# Altium PCB PCB1.PcbDoc
Units mm, origin at the board's own origin, x right, y up, seen from the top; angles counter-clockwise.
Board outline 42.96 x 79.64 mm, 2 copper layers (Top Layer, Bottom Layer); 26 components, 47 nets, 134 pads, 6 vias.
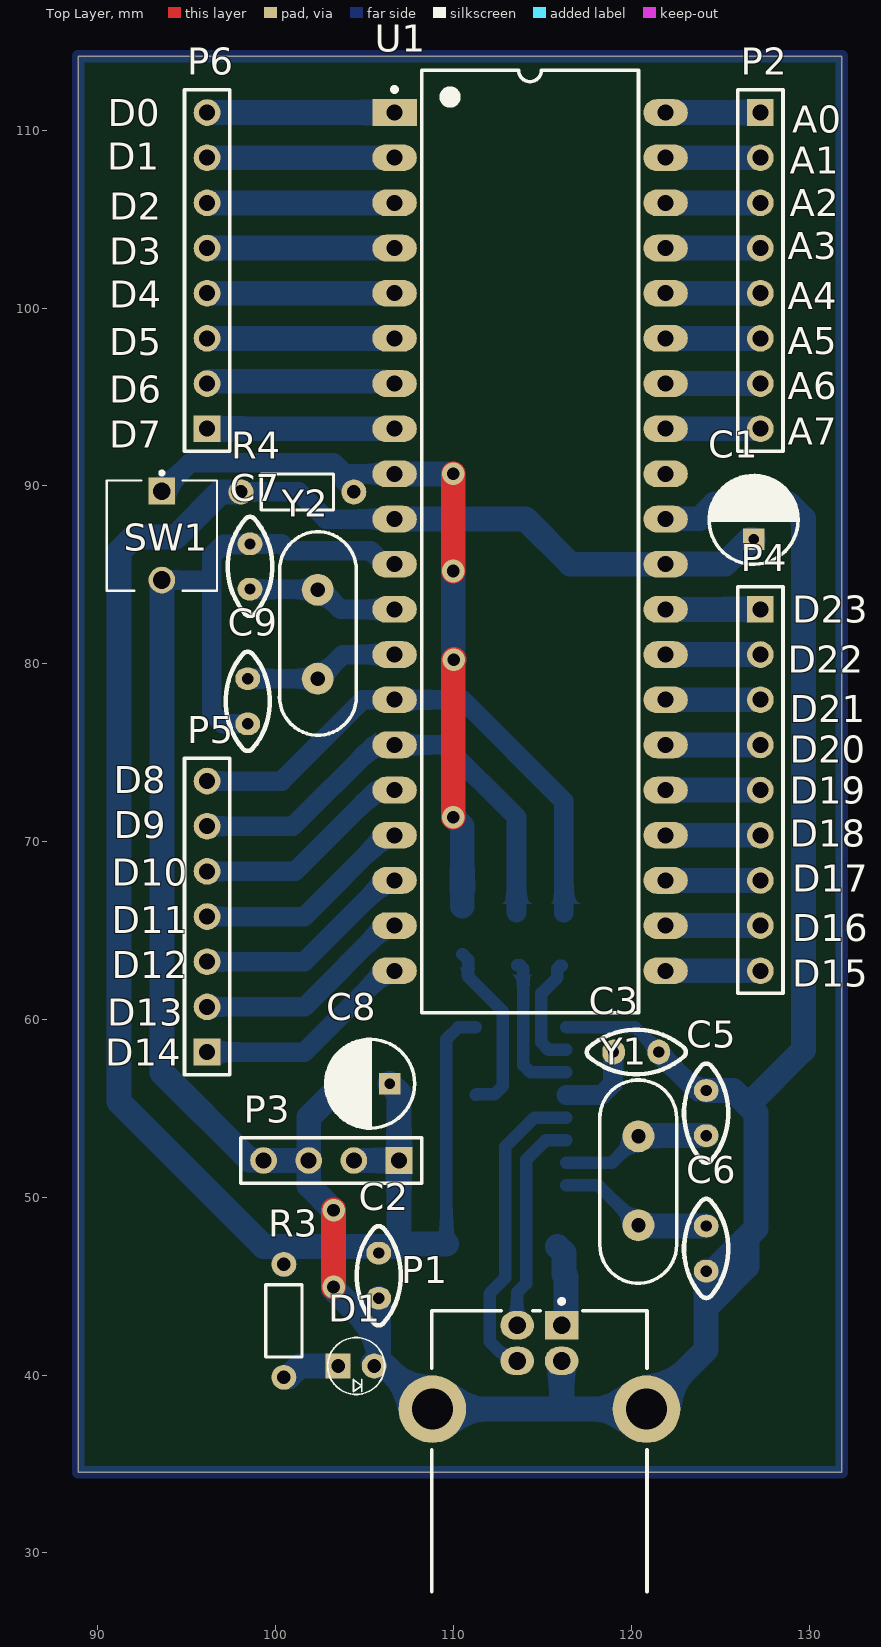
[diagram p0: Top Layer view]
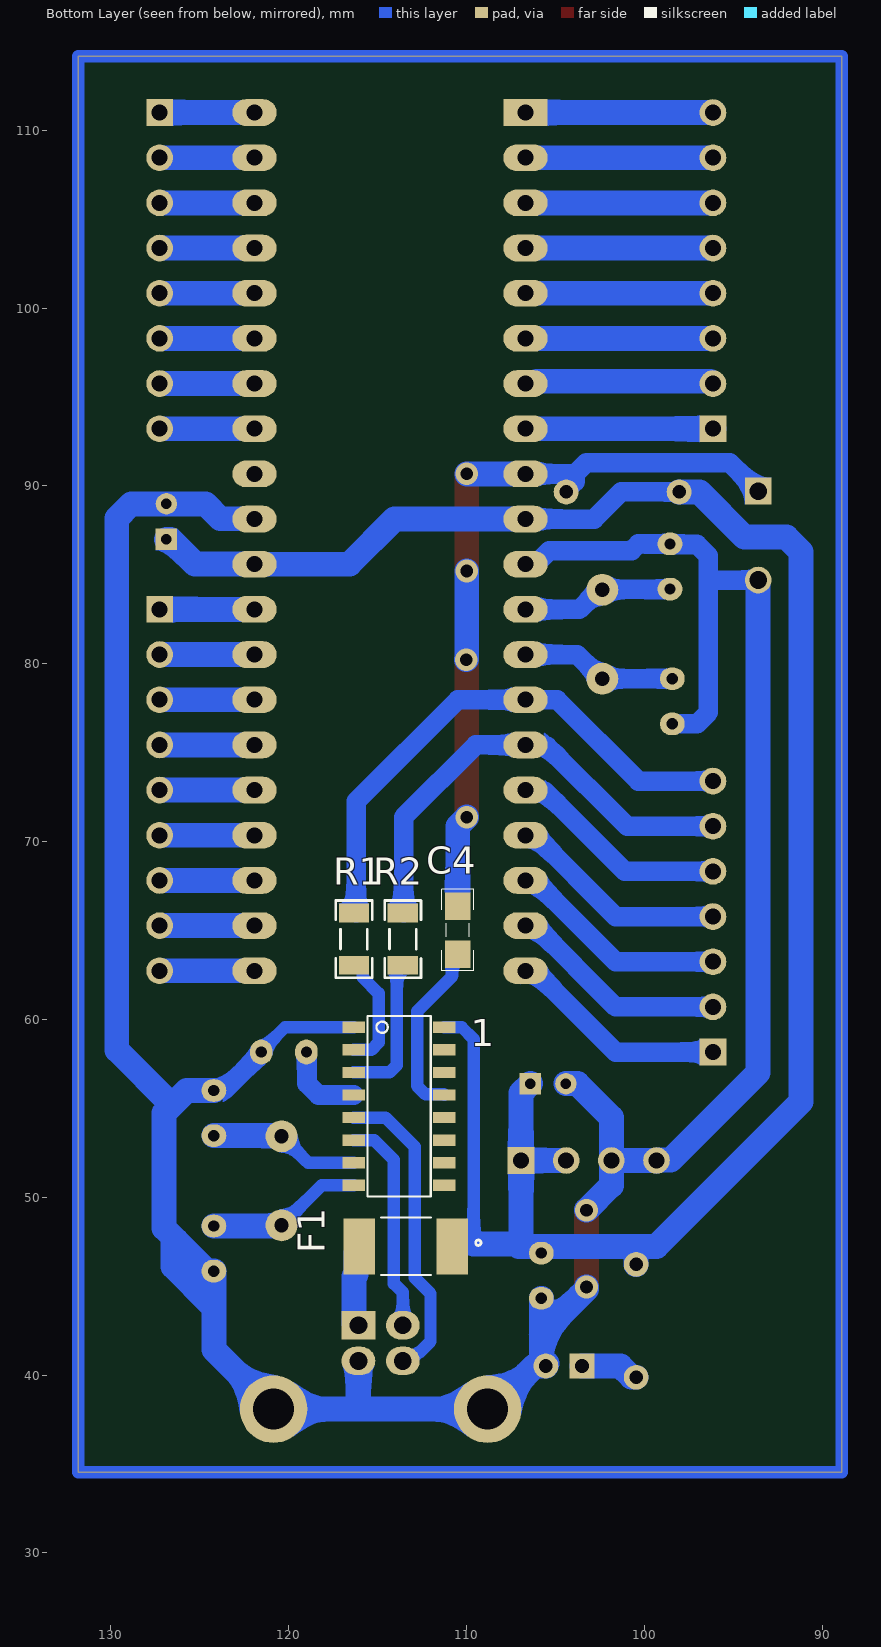
[diagram p1: Bottom Layer view, seen from below]
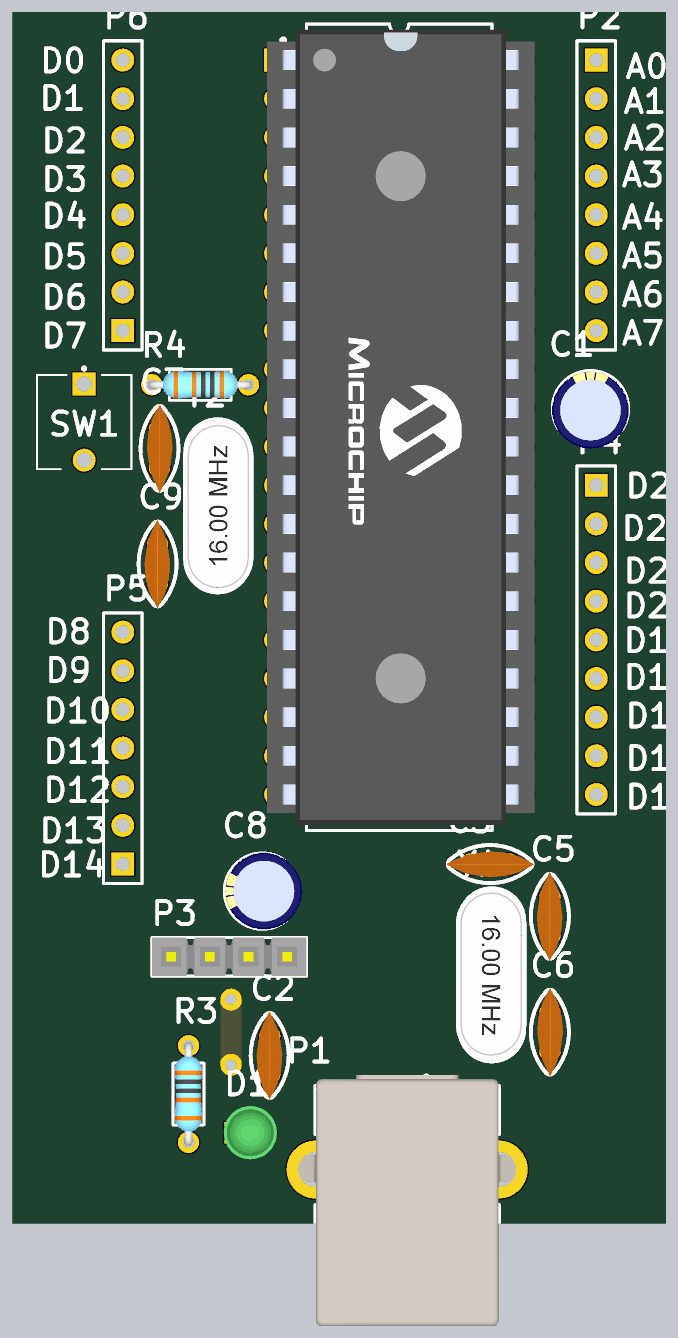
[diagram p2: 3D render of the assembled board from above, using the file's embedded part models]
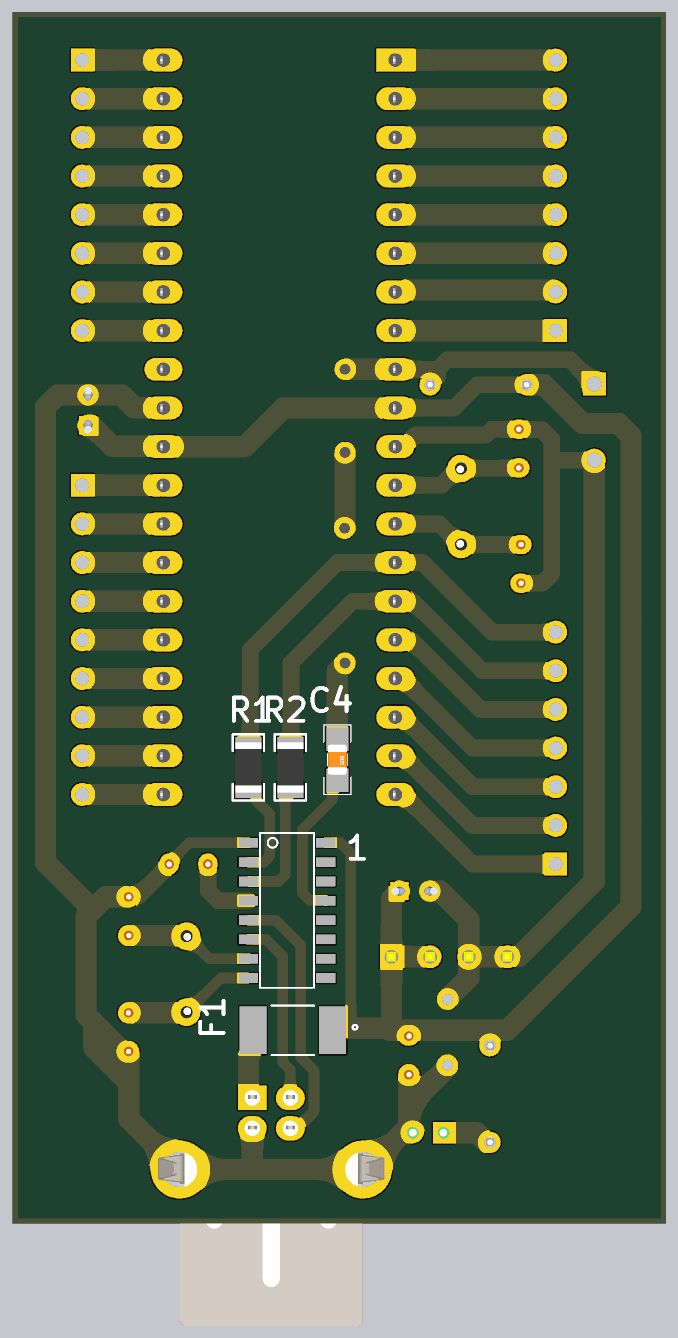
[diagram p3: 3D render of the assembled board from below, using the file's embedded part models]

## Layer stack, top to bottom
Top Solder: solder mask 0.0102, Solder Resist, Dk 3.5
Top Layer: signal copper 0.0356
Dielectric 1: dielectric 0.32, FR-4, Dk 4.8
Bottom Layer: signal copper 0.0356
Bottom Solder: solder mask 0.0102, Solder Resist, Dk 3.5

## Board outline
88.885,34.529 88.885,114.173 131.841,114.173 131.841,34.529

## Design rules (kind name [scope] priority, off if disabled: settings)
Clearance [All] p1: gap=0.254 ignorepadtopadclearanceinfootprint=FALSE except(0: Arc-Hole Track-Hole SMDPad-Hole THPad-Hole Via-Hole Fill-Hole Poly-Hole Region-Hole Text-Hole)
PolygonConnect [All] p1: connectstyle=Relief reliefconductorwidth=0.254 reliefentries=4 polygonreliefangle="90 Angle" airgapwidth=0.254
RoutingVias [All] p1: holewidth=0.711 width=1.27 viastyle="Through Hole" minholewidth=0.711 minwidth=1.27 maxholewidth=0.711 maxwidth=1.27
SolderMaskExpansion [All] p1: expansion=0.102 istentingtop=FALSE
Width [All] p1: maxlimit=1.4 minlimit=0.7 preferedwidth=1.1
30 further rules are at their usual default settings.

## Components (designator, comment, footprint, x,y, rotation, side; value= is the part's Value field where it differs from the comment)
1 "CH340" SOIC16 113.792,55.753 r180 bottom
C1 "100UF" "Cap electrolitic radial 5x12-2" 126.873,87.995 r90 top value=1uF
C2 "47nF" Cap-100nF 105.791,45.593 r270 top
C3 "100nF" Cap-100nF 120.269,58.166 r0 top
C4 "0.1UF" CAPC3413X12N 110.49,65.024 r270 bottom
C5 "22pF" Cap-100nF 124.206,54.737 r270 top
C6 "22pF" Cap-100nF 124.206,47.117 r90 top
C7 "100nF" Cap-100nF 98.552,85.471 r90 top
C8 "100UF" "Cap electrolitic radial 5x12-2" 105.41,56.388 r180 top value=1uF
C9 "100nF" Cap-100nF 98.425,77.891 r270 top
D1 "LED3MM" LED3mm_GRN 104.521,40.513 r0 top
F1 "1812L200/12DR" FUSE_1812L200/12DR 113.411,47.244 r0 bottom
P1 "USB Connector" USB2.5-2H4F 116.078,42.799 r270 top
P2 "Header 8" HDR1X8 127.254,110.998 r270 top
P3 "Header 4" HDR1X4 106.934,52.07 r180 top
P4 "Header 9" HDR1X9 127.254,83.058 r270 top
P5 "Header 7" HDR1X7 96.139,58.166 r90 top
P6 "Header 8" HDR1X8 96.139,93.218 r90 top
R1 "1K" RES1206 116.332,64.516 r270 bottom
R2 "1K" RES1206 113.578,64.516 r270 bottom
R3 "1K" RES-(1/4) 100.457,43.053 r270 top
R4 "10K" RES-(1/4) 101.219,89.662 r180 top
SW1 "FSM8JRT" TE_FSM8JRT 93.599,89.713 r270 top
U1 "ATmega32-16PI" 40P6 114.3,86.868 r0 top
Y1 "12 MHz" "XTAL 16MHZ" 120.396,50.927 r270 top
Y2 "16 MHz" "XTAL 16MHZ" 102.362,81.661 r90 top value="12 MHz"

## Footprints (in the part's own frame and the unit in brackets; to place one, negate y for a bottom-side part, rotate by r counter-clockwise, add the part's x,y. Pads: shape width x height; smd on the part's side, far side on the other; paste and mask are expansions set on the pad)
40P6 [mm] "DIP, 40-Leads, Row Spacing 15.24mm, Pitch 2.54mm, Body 52.2x13.95mm"
  rect 2.5x1.5 hole 0.9: 1(-7.62,24.13)
  oval 2.5x1.5 hole 0.9: 2(-7.62,21.59) 3(-7.62,19.05) 4(-7.62,16.51) 5(-7.62,13.97) 6(-7.62,11.43) 7(-7.62,8.89) 8(-7.62,6.35) 9(-7.62,3.81) 10(-7.62,1.27) 11(-7.62,-1.27) 12(-7.62,-3.81) 13(-7.62,-6.35) 14(-7.62,-8.89) 15(-7.62,-11.43) 16(-7.62,-13.97) 17(-7.62,-16.51) 18(-7.62,-19.05) 19(-7.62,-21.59) 20(-7.62,-24.13) 21(7.62,-24.13) 22(7.62,-21.59) 23(7.62,-19.05) 24(7.62,-16.51) 25(7.62,-13.97) 26(7.62,-11.43) 27(7.62,-8.89) 28(7.62,-6.35) 29(7.62,-3.81) 30(7.62,-1.27) 31(7.62,1.27) 32(7.62,3.81) 33(7.62,6.35) 34(7.62,8.89) 35(7.62,11.43) 36(7.62,13.97) 37(7.62,16.51) 38(7.62,19.05) 39(7.62,21.59) 40(7.62,24.13)
  silkscreen extent -7.74,-26.5 6.1,26.5, body extent -8.7,-26.13 8.9,26.13, height 7.89
"Cap electrolitic radial 5x12-2" [mm] "Cap electrolitic radial 5x12-2-Design:Abbas Basereh"
  rect 1.2x1.2 hole 0.6: 1(-1,0)
  round 1.2 hole 0.6: 2(1,0)
  silkscreen extent -2.4,-2.5 2.6,2.5, body extent -2.54,-2.54 2.54,2.54, height 12.2
Cap-100nF [mil] "Bipolar Capacitor-Design:Ali Hafizi"
  oval 50x55 hole 25: 1(-50,0) 2(50,0)
  silkscreen extent -110,-49 110,49, body extent -115,-34 115,33, height 272
CAPC3413X12N [mm] "Chip Capacitor, 2-Leads, Body 3/40x1/30mm, IPC Medium Density-Design:Abbas Basereh"
  rect 1.55x1.45 smd: 1(-1.35,0) 2(1.35,0)
  silkscreen extent -2.29,-0.89 2.29,0.89, body extent -1,-0.63 1,0.62, height 0.78
FUSE_1812L200/12DR [mm]
  rect 1.78x3.15 smd: 1(-2.615,0) 2(2.615,0)
  silkscreen extent -4.23,-1.62 1.4,1.62
HDR1X4 [mm] "Connector; Header; 4 Position"
  rect 1.5x1.5 hole 0.9: 1(0,0)
  round 1.5 hole 0.9: 2(2.54,0) 3(5.08,0) 4(7.62,0)
  silkscreen extent -1.27,-1.27 8.89,1.27, body extent -1.27,-1.28 8.89,1.26, height 8.38
HDR1X7 [mm] "Connector; Header; 7 Position"
  rect 1.5x1.5 hole 0.9: 1(0,0)
  round 1.5 hole 0.9: 2(2.54,0) 3(5.08,0) 4(7.62,0) 5(10.16,0) 6(12.7,0) 7(15.24,0)
  silkscreen extent -1.27,-1.27 16.51,1.27
HDR1X8 [mm] "Connector; Header; 8 Position"
  rect 1.5x1.5 hole 0.9: 1(0,0)
  round 1.5 hole 0.9: 2(2.54,0) 3(5.08,0) 4(7.62,0) 5(10.16,0) 6(12.7,0) 7(15.24,0) 8(17.78,0)
  silkscreen extent -1.27,-1.27 19.05,1.27
HDR1X9 [mm] "Connector; Header; 9 Position"
  rect 1.5x1.5 hole 0.9: 1(0,0)
  round 1.5 hole 0.9: 2(2.54,0) 3(5.08,0) 4(7.62,0) 5(10.16,0) 6(12.7,0) 7(15.24,0) 8(17.78,0) 9(20.32,0)
  silkscreen extent -1.27,-1.27 21.59,1.27
LED3mm_GRN [mil]
  rect 55x55 hole 30: 1(-40,0)
  round 55 hole 30: 2(40,0)
  silkscreen extent -63,-63 63,63, body extent -69,-69 69,69, height 154
RES1206 [mm] "Chip Resistor, 2-Leads, Body 3/20x1/60mm, IPC Medium Density DESIGNER:ABBAS BASEREH"
  rect 1.05x1.7 smd: 1(-1.475,0) 2(1.475,0)
  silkscreen extent -2.17,-1.02 2.17,1.02, body extent -1.65,-0.85 1.65,0.85, height 0.94
RES-(1/4) [mil]
  round 55 hole 30: 1(-125,0) 2(125,0)
  silkscreen extent -80,-40 80,40, body extent -135,-36 135,36, height 115
SOIC16 [mm]
  rect 1.27x0.635 smd: 1(-2.54,3.81) 2(-2.54,2.54) 3(-2.54,1.27) 4(-2.54,0) 5(-2.54,-1.27) 6(-2.54,-2.54) 7(-2.54,-3.81) 8(-2.54,-5.08) 9(2.54,-5.08) 10(2.54,-3.81) 11(2.54,-2.54) 12(2.54,-1.27) 13(2.54,0) 14(2.54,1.27) 15(2.54,2.54) 16(2.54,3.81)
  silkscreen extent -1.78,-5.71 1.78,4.44
TE_FSM8JRT [mil]
  rect 59x59 hole 39: 1(0,0)
  round 59 hole 39: 2(197,0)
  silkscreen extent -44,-122 221,122
USB2.5-2H4F [mm] "Connector; USB1.1, Type B, Thru-Hole; 4 Position; Right Angle"
  rect 1.6x1.9 hole 1: 1(0,0)
  oval 1.6x1.9 hole 1: 2(0,-2.5) 3(2,-2.5) 4(2,0)
  round 3.8 hole 2.3: 4(4.71,4.77) 4(4.71,-7.27)
  silkscreen extent -1.47,-7.3 14.99,4.8, body extent -1.5,-8.7 15,6.2, height 10.95
"XTAL 16MHZ" [mm] "Crystal Oscillator"
  round 1.8 hole 0.8: 1(-2.5,0) 2(2.5,0)
  silkscreen extent -5.67,-2.18 5.76,2.15, body extent -5.68,-2.38 5.67,2.27, height 0.99

## Part data
1: "Circuit Breaker Magnetic 3Pole 40A 240VAC", Package=None, Availability=Unavailable, MF=Eaton, MP=CH340, Price=None, SnapEDA_Link=https://www.snapeda.com/parts/CH340/Eaton/view-part/4701946/?ref=snap
C1 C8: library part "Cap ELECTROLITIC TOTAL SIZE", "Cap electrolitic radial", Data=16-12-2016, Designer="Abbas Basereh"
C2 C3 C5 C6 C7 C9: library part "CAP CERAMIC TOTAL SIZE", "CAP Ceramic Total", Designer="Ali Hafizi"
C4: library part "CAP SMD 0805", "CAP 0805", Data=16-12-2016, Desc.="CAP SMD 0805", Designer="Abbas Basereh"
D1: library part "LED 3MM", "Light Emitting Diode", Designer="Ali Hafizi"
F1: "Polymeric PTC Resettable Fuse 12V 2A Ih Surface Mount 1812 (4532 Metric), Concave", Package="1812 Littelfuse", Availability=Warning, MF="Littelfuse Inc.", Mouser-Purchase-URL=https://snapeda.com/shop?store=Mouser&id=1314296, MP=1812L200/12DR, Price=None, SnapEDA_Link=https://www.snapeda.com/parts/1812L200/12DR/Littelfuse%20Inc./view-part/1314296/?ref=snap
P1: library part "USB B-Type", "USB Connector-B Type", Adding Date=10/26/2010
P2 P6: "Header, 8-Pin", LatestRevisionDate=17-Jul-2002, LatestRevisionNote="Re-released for DXP Platform.", Publisher="Altium Limited"
P3: "Header, 4-Pin", LatestRevisionDate=17-Jul-2002, LatestRevisionNote="Re-released for DXP Platform.", Publisher="Altium Limited"
P4: "Header, 9-Pin", LatestRevisionDate=17-Jul-2002, LatestRevisionNote="Re-released for DXP Platform.", Publisher="Altium Limited"
P5: "Header, 7-Pin", LatestRevisionDate=17-Jul-2002, LatestRevisionNote="Re-released for DXP Platform.", Publisher="Altium Limited"
R1 R2: library part "RES SMD PACKAGE", "TOTAL SMD RESISTOR PACK", Data=2017-3-10, Desc.="RES SMD PAKAGES", Designer="Abbas Basereh"
R3 R4: library part "RES DIP PACKAGE", "TOTAL DIP RESISTOR PACK", Designer="Ali Hafizi"
SW1: "Switch Tactile OFF _ON_ SPST Round Button PC Pins 0.05A 12VDC 1.57N Thru-Hole Radial Tape", Contact_Current_Rating="50 mA", Package=None, Availability=Unavailable, Configuration_Pole-Throw="Single Pole - Single Throw", EU_RoHS_Compliance=Compliant, MF="TE Connectivity", MP=FSM8JRT, Price=None, SnapEDA_Link=https://www.snapeda.com/parts/FSM8JRT/TE%20Connectivity%20ALCOSWITCH%20Switches/view-part/226999/?ref=snap, TE_purchase_URL=https://www.te.com/usa-en/product-147694-1.html?te_bu=Cor&te_type=disp&te_campaign=seda_glo_cor-seda-global-disp-prtnr-fy19-seda-model-bom-cta_sma-317_1&elqCampaignId=32493
U1: "8-Bit AVR Microcontroller with 32K Bytes of In-System Programmable Flash Memory", Supplier Part Number 1=ATMEGA32-16PI-ND, Code_JEDEC=MS-011-AC, ComponentLink1Description=Datasheet, ComponentLink1URL=http://www.atmel.com/dyn/resources/prod_documents/doc2503.pdf, ComponentLink2Description="Atmel.com Home", ComponentLink2URL=http://www.atmel.com, DatasheetVersion=2503C-AVR-10/02, PackageDescription="40-lead (0.600\"/15.24mm Wide) Plastic Dual Inline Package (PDIP)", PackageReference=40P6, PackageVersion=2017-1-4, Published=2017-1-4, Publisher="Abbas Basereh", Supplier 1=Digi-Key, Supplier 2=Farnell, Supplier 3=Mouser, Supplier Part Number 2=4376328, Supplier Part Number 3=556-ATMEGA32-16PI
Y1 Y2: library part XTAL, "XTAL Crystal", ComponentLink1Description=Datasheet, ComponentLink2Description=Reference, Design Date=2017-1-3, Designer="ABBAS BASEREH", Mounting Technology="Surface Mount\Through-Hole", Status=Unreleased

## Via types
v1: diameter 1.27, hole 0.711, Top Layer to Bottom Layer, 6 vias

## Nets (pads, with @x,y where several pads share a name; then routed paths per layer and width w, separated by ;. In a path a pad name is that pad's centre, name@x,y a point inside that pad or via, vN(x,y) a via of type N, cw(c..) or ccw(c..) an arc to the next point about the centre after c; other vN are vias at no path point)
3.3: 1.4 C3.1 | length 4.7
  Bottom Layer w1.1: 1.4 118.322,55.753 118.966,56.397 118.966,58.133 C3.1
+5: 1.16 C1.1 C2.1 C8.1 F1.1 P3.1 P3.2 R3.1 R4.2 U1.10 U1.30 | length 118.6
  Bottom Layer w0.7: 109.601,47.371 109.601,58.899 110.265,59.563 1.16
  Bottom Layer w1.1: R4.2 101.298,89.662 102.822,88.138 U1.10
  Bottom Layer w1.4: R4.2 96.901,89.662 94.361,87.122 92.006,87.122 91.186,86.302 91.186,55.372 99.314,47.244 100.457,47.244 ; R3.1 100.457,47.244 ; P3.2 P3.1 ; C8.1 106.934,55.864 P3.1 ; U1.10 114.046,88.138 116.586,85.598 U1.30 121.939,85.617 125.266,85.617 126.644,86.995 C1.1 ; 109.601,47.371 106.934,47.371 ; 100.457,47.244 105.791,47.244 107.061,47.244 106.934,47.371 ; 106.934,47.371 P3.1
GND: 1.1 C1.2 C2.2 C3.2 C5.1 C6.1 C7.2 C8.2 C9.2 D1.2 P1.4 P3.3 P3.4 SW1.2 U1.11 U1.31 | length 182.6
  Top Layer w1.4: v1(103.251,44.958) v1(103.251,49.276)
  Bottom Layer w0.7: 1.1 120.206,59.563 121.539,58.229 C3.2
  Bottom Layer w1.1: SW1.2 96.139,84.709 96.393,84.455 ; C9.2 97.037,76.621 96.393,77.265 96.393,84.455 ; U1.11 106.098,85.598 105.336,86.36 100.711,86.36 100.33,86.741 C7.2 98.519,86.708 97.037,86.708 96.393,86.064 96.393,84.455 ; C3.2 121.539,58.102 123.602,56.04 124.173,56.04 C5.1
  Bottom Layer w1.4: SW1.2 93.599,57.023 98.533,52.089 99.268,52.089 P3.4@99.314,52.043 ; P3.4 P3.3 ; v1(103.251,44.958) 103.251,44.831 105.791,42.291 ; v1(103.251,49.276) 101.854,50.673 P3.3 ; C8.2 103.759,56.388 101.854,54.483 P3.3 ; C2.2 105.791,42.291 ; P1.4@116.078,40.799 116.078,38.343 115.824,38.089 ; U1.31 121.939,88.157 123.844,88.157 124.682,88.995 C1.2 128.847,88.995 129.667,88.175 129.667,58.293 126.555,55.181 ; C5.1 125.73,56.007 126.555,55.181 ; 124.333,43.942 126.492,46.101 126.492,47.371 ; 105.791,42.291 105.791,40.842 105.462,40.66 D1.2 106.172,40.513 108.596,38.089 115.824,38.089 ; 115.824,38.089 120.848,38.089 124.206,41.447 124.206,43.942 C6.1 124.587,45.847 126.301,47.561 127,48.26 127,54.737 126.555,55.181
Net1_2: 1.2 R1.2 | length 6.4
  Bottom Layer w0.7: R1.2@116.078,63.012 115.978,63.012 115.832,62.866 115.832,62.365 114.935,61.468 114.935,58.703 115.345,58.293 1.2
Net1_3: 1.3 R2.2 | length 8.4
  Bottom Layer w0.7: R2.2 113.744,63.041 113.919,62.866 113.919,57.433 114.329,57.023 1.3
Net1_5: 1.5 P1.3 | length 17.4
  Bottom Layer w0.7: P1.3 113.184,40.799 112.734,41.249 112.678,41.249 112.024,41.903 112.024,44.587 112.903,45.466 112.903,52.832 114.554,54.483 1.5
Net1_6: 1.6 P1.2 | length 12.2
  Bottom Layer w0.7: P1.2 113.578,44.649 114.08,45.151 114.08,52.104 115.189,53.213 1.6
Net1_7: 1.7 C5.2 Y1.1 | length 8.5
  Bottom Layer w0.7: 1.7 118.912,51.943 Y1.1
  Bottom Layer w1.4: Y1.1 120.436,53.467 C5.2
Net1_8: 1.8 C6.2 Y1.2 | length 8.8
  Bottom Layer w0.7: 1.8 118.15,50.673 Y1.2
  Bottom Layer w1.4: Y1.2 120.436,48.387 C6.2
Net1_13: 1.13 C4.2 | length 10.1
  Bottom Layer w0.7: C4.2 110.814,63.35 110.814,62.414 112.776,60.452 112.776,56.261 112.301,55.786 111.285,55.786 1.13
NetC4_1: C4.1 R4.1 SW1.1 U1.9 | length 43.1
  Top Layer w1.4: v1(109.982,71.374) 109.982,80.2 v1(110.014,80.232) ; v1(109.982,85.217) v1(109.982,90.678)
  Bottom Layer w1.1: SW1.1 95.199,91.313 103.251,91.313 103.886,90.678 ; R4.1 104.394,89.742 103.886,90.25 103.886,90.678 ; U1.9 103.886,90.678
  Bottom Layer w1.4: U1.9 v1(109.982,90.678) ; v1(109.982,71.374) 110.49,70.866 C4.1 ; v1(109.982,85.217) 109.982,80.264 v1(110.014,80.232)
NetC7_1: C7.1 U1.12 Y2.2 | length 8.6
  Bottom Layer w1.1: C7.1 98.572,84.181 102.342,84.181 Y2.2 102.551,84.161 103.654,83.058 U1.12
NetC9_1: C9.1 U1.13 Y2.1 | length 8.8
  Bottom Layer w1.1: C9.1 Y2.1 102.423,79.161 103.78,80.518 U1.13
NetD1_1: D1.1 R3.2 | length 3.3
  Bottom Layer w1.4: R3.2 100.711,39.878 101.346,40.513 D1.1
NetF1_2: F1.2 P1.1 | length 4.8
  Bottom Layer w1.4: F1.2@115.836,47.244 116.216,46.864 116.216,45.665 116.332,45.549 116.332,43.719 116.328,43.715 116.328,42.899 116.228,42.799 P1.1
NetP2_1: P2.1 U1.40 | length 5.3
  Bottom Layer w1.4: U1.40 P2.1
NetP2_2: P2.2 U1.39 | length 5.3
  Bottom Layer w1.4: U1.39 P2.2
NetP2_3: P2.3 U1.38 | length 5.3
  Bottom Layer w1.4: U1.38 P2.3
NetP2_4: P2.4 U1.37 | length 5.3
  Bottom Layer w1.4: U1.37 P2.4
NetP2_5: P2.5 U1.36 | length 5.3
  Bottom Layer w1.4: U1.36 P2.5
NetP2_6: P2.6 U1.35 | length 5.3
  Bottom Layer w1.4: U1.35 P2.6
NetP2_7: P2.7 U1.34 | length 5.3
  Bottom Layer w1.4: U1.34 P2.7
NetP2_8: P2.8 U1.33 | length 5.3
  Bottom Layer w1.4: U1.33 P2.8
NetP4_1: P4.1 U1.29 | length 5.3
  Bottom Layer w1.4: U1.29 P4.1
NetP4_2: P4.2 U1.28 | length 5.3
  Bottom Layer w1.4: U1.28 P4.2
NetP4_3: P4.3 U1.27 | length 5.3
  Bottom Layer w1.4: U1.27 P4.3
NetP4_4: P4.4 U1.26 | length 5.3
  Bottom Layer w1.4: U1.26 P4.4
NetP4_5: P4.5 U1.25 | length 5.3
  Bottom Layer w1.4: U1.25 P4.5
NetP4_6: P4.6 U1.24 | length 5.3
  Bottom Layer w1.4: U1.24 P4.6
NetP4_7: P4.7 U1.23 | length 5.3
  Bottom Layer w1.4: U1.23 P4.7
NetP4_8: P4.8 U1.22 | length 5.3
  Bottom Layer w1.4: U1.22 P4.8
NetP4_9: P4.9 U1.21 | length 5.3
  Bottom Layer w1.4: U1.21 P4.9
NetP5_1: P5.1 U1.20 | length 12.4
  Bottom Layer w1.1: P5.1 101.608,58.166 106.18,62.738 U1.20
NetP5_2: P5.2 U1.19 | length 12.4
  Bottom Layer w1.1: P5.2 101.608,60.706 106.18,65.278 U1.19
NetP5_3: P5.3 U1.18 | length 12.4
  Bottom Layer w1.1: P5.3 101.608,63.246 106.18,67.818 U1.18
NetP5_4: P5.4 U1.17 | length 12.4
  Bottom Layer w1.1: P5.4 101.608,65.786 106.18,70.358 U1.17
NetP5_5: P5.5 U1.16 | length 12.4
  Bottom Layer w1.1: P5.5 101.092,68.326 105.587,72.821 106.603,72.821 U1.16
NetP5_6: P5.6 R2.1 U1.15 | length 26.3
  Bottom Layer w1.1: P5.6 100.965,70.866 105.46,75.361 106.603,75.361 U1.15 109.474,75.438 113.538,71.374 R2.1@113.538,66.016
NetP5_7: P5.7 R1.1 U1.14 | length 30.6
  Bottom Layer w1.1: P5.7 100.33,73.406 104.902,77.978 U1.14 110.49,77.978 116.205,72.263 R1.1@116.205,66.016
NetP6_1: P6.1 U1.8 | length 10.6
  Bottom Layer w1.4: P6.1@96.089,93.218 U1.8
NetP6_2: P6.2 U1.7 | length 10.6
  Bottom Layer w1.4: P6.2@96.166,95.758 96.293,95.885 106.026,95.885 106.153,95.758 U1.7
NetP6_3: P6.3 U1.6 | length 10.6
  Bottom Layer w1.4: P6.3@96.093,98.298 U1.6
NetP6_4: P6.4 U1.5 | length 10.6
  Bottom Layer w1.4: P6.4@96.093,100.838 U1.5
NetP6_5: P6.5 U1.4 | length 10.5
  Bottom Layer w1.4: P6.5@96.138,103.378 U1.4
NetP6_6: P6.6 U1.3 | length 10.5
  Bottom Layer w1.4: P6.6@96.168,105.918 U1.3
NetP6_7: P6.7 U1.2 | length 10.5
  Bottom Layer w1.4: P6.7@96.17,108.458 U1.2
NetP6_8: P6.8 U1.1 | length 10.6
  Bottom Layer w1.4: P6.8@96.093,110.998 U1.1
pads on no net: 1.9 1.10 1.11 1.12 1.14 1.15 U1.32
copper on no net: | length 245.2
  Bottom Layer w0.7: 88.885,34.529 88.885,114.173 131.841,114.173 131.841,34.529 88.885,34.529

## Silkscreen, mask and mechanical layers (free items; w line width, h text height)
Top Overlay:
  text "D0" at 90.551,110.236 h1.52
  text "A0" at 129.032,109.855 h1.52
  text "D1" at 90.524,107.773 h1.52
  text "A1" at 128.905,107.569 h1.52
  text "A2" at 128.905,105.156 h1.52
  text "D2" at 90.651,104.979 h1.52
  text "A3" at 128.778,102.743 h1.52
  text "D3" at 90.651,102.439 h1.52
  text "D4" at 90.651,100.026 h1.52
  text "A4" at 128.778,99.949 h1.52
  text "A5" at 128.778,97.409 h1.52
  text "D5" at 90.651,97.359 h1.52
  text "A6" at 128.778,94.869 h1.52
  text "D6" at 90.651,94.692 h1.52
  text "A7" at 128.778,92.329 h1.52
  text "D7" at 90.651,92.152 h1.52
  text "D23" at 129.032,82.296 h1.52
  text "D22" at 128.778,79.502 h1.52
  text "D21" at 128.905,76.708 h1.52
  text "D20" at 128.905,74.422 h1.52
  text "D8" at 90.905,72.721 h1.52
  text "D19" at 128.905,72.136 h1.52
  text "D9" at 90.905,70.181 h1.52
  text "D18" at 128.905,69.723 h1.52
  text "D10" at 90.778,67.514 h1.52
  text "D17" at 129.032,67.183 h1.52
  text "D11" at 90.778,64.847 h1.52
  text "D16" at 129.032,64.389 h1.52
  text "D12" at 90.778,62.307 h1.52
  text "D15" at 129.032,61.849 h1.52
  text "D13" at 90.524,59.64 h1.52
  text "D14" at 90.424,57.404 h1.52

## Text inside footprints (layer, text, board x,y; h text height)
P1: Mechanical 1 "PCB Edge" at 109.176,28.114 h0.25